# Altium PCB Multiç.PcbDoc
Units mm, origin at the board's own origin, x right, y up, seen from the top; angles counter-clockwise.
Board outline 54.1 x 51.31 mm, 4 copper layers (Top Layer, Layer 2, Layer 3, Bottom Layer), stack 1.391 mm thick; 18 components, 10 nets, 44 pads, 12 vias.
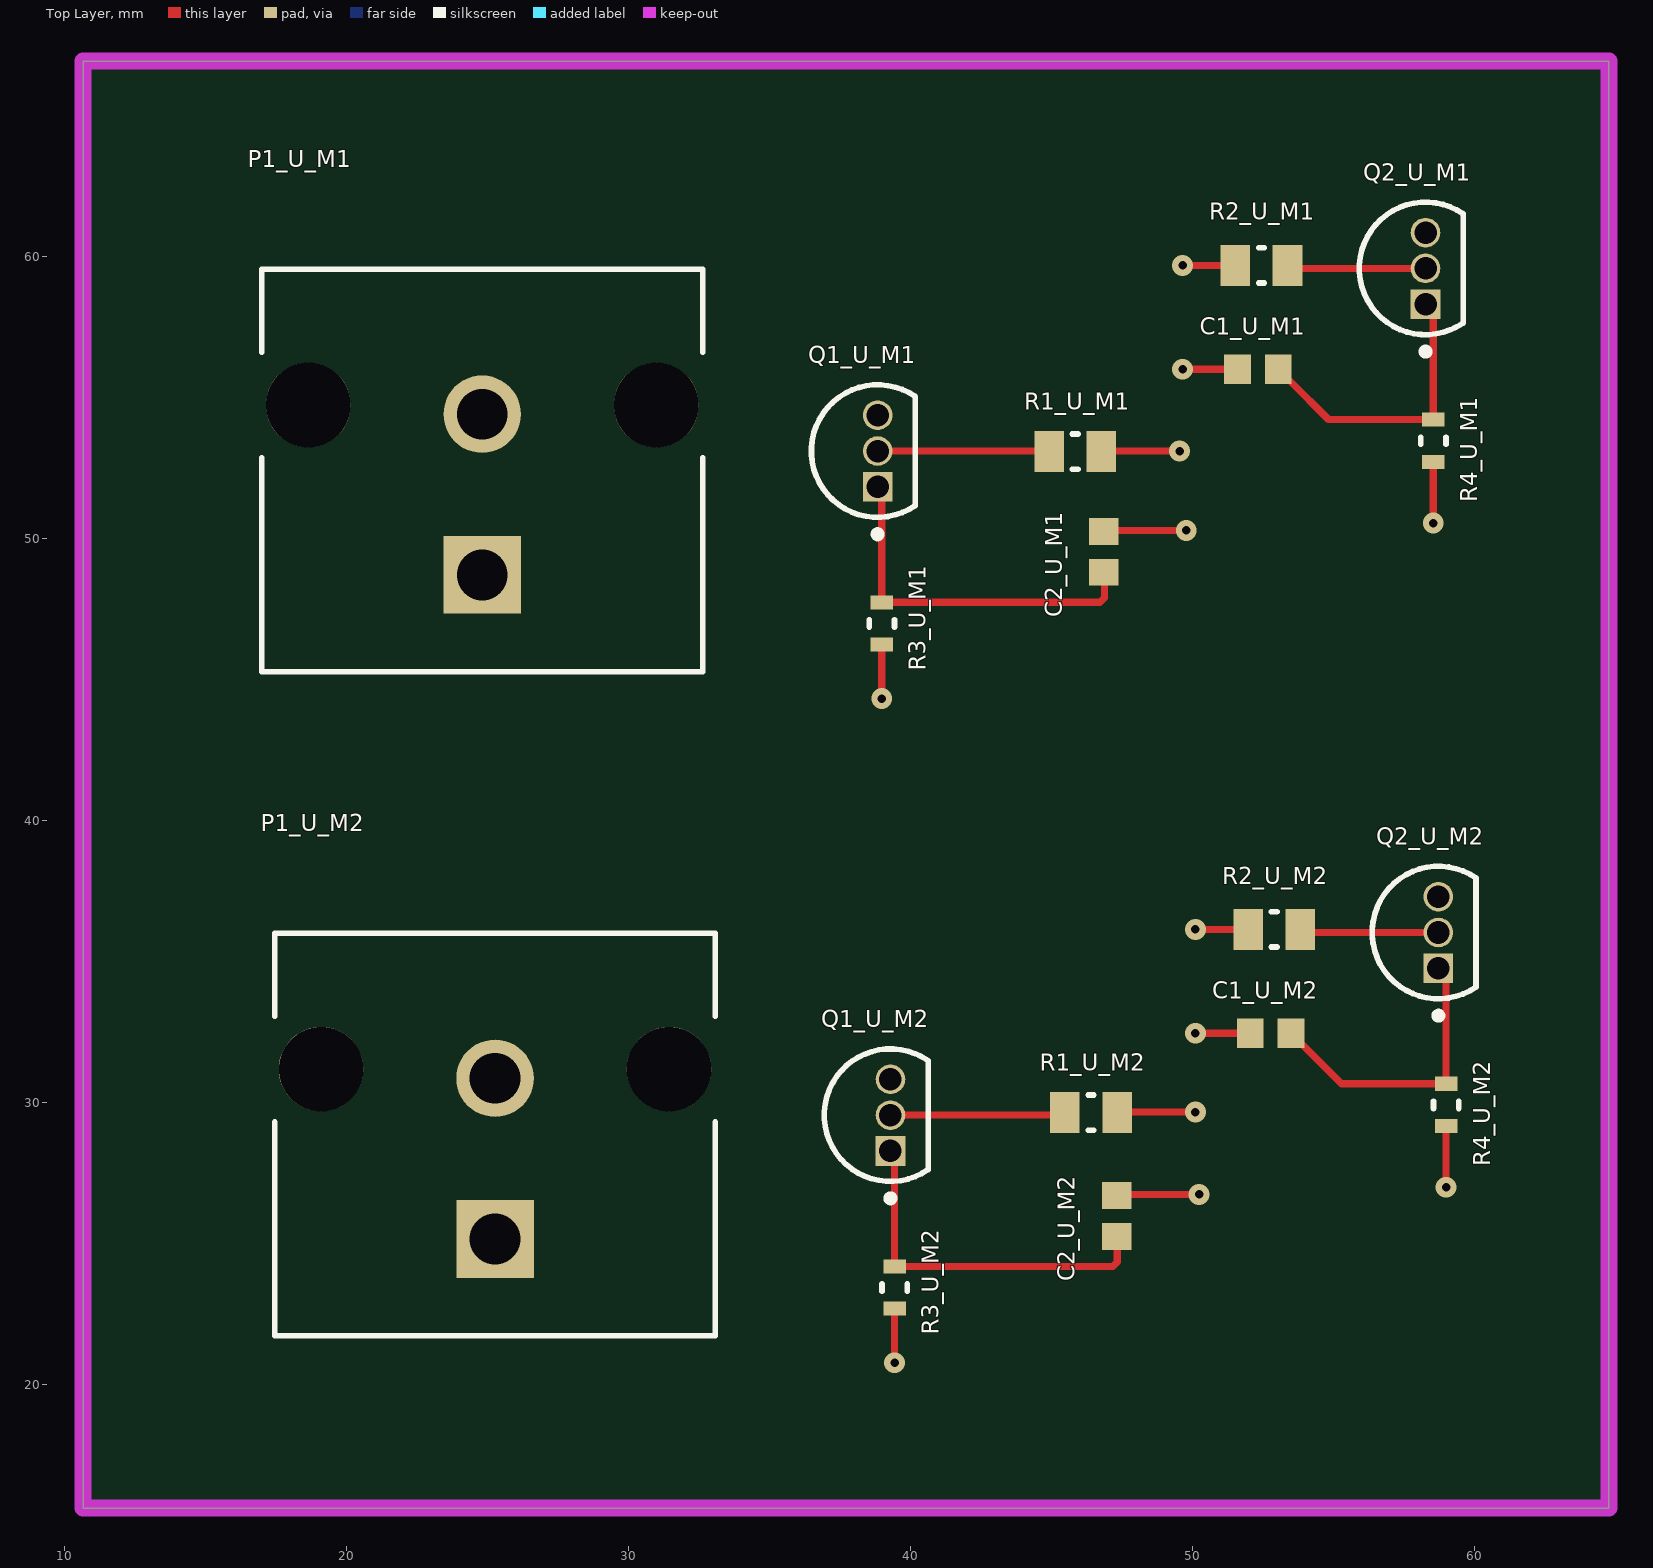
[diagram p0: Top Layer view]
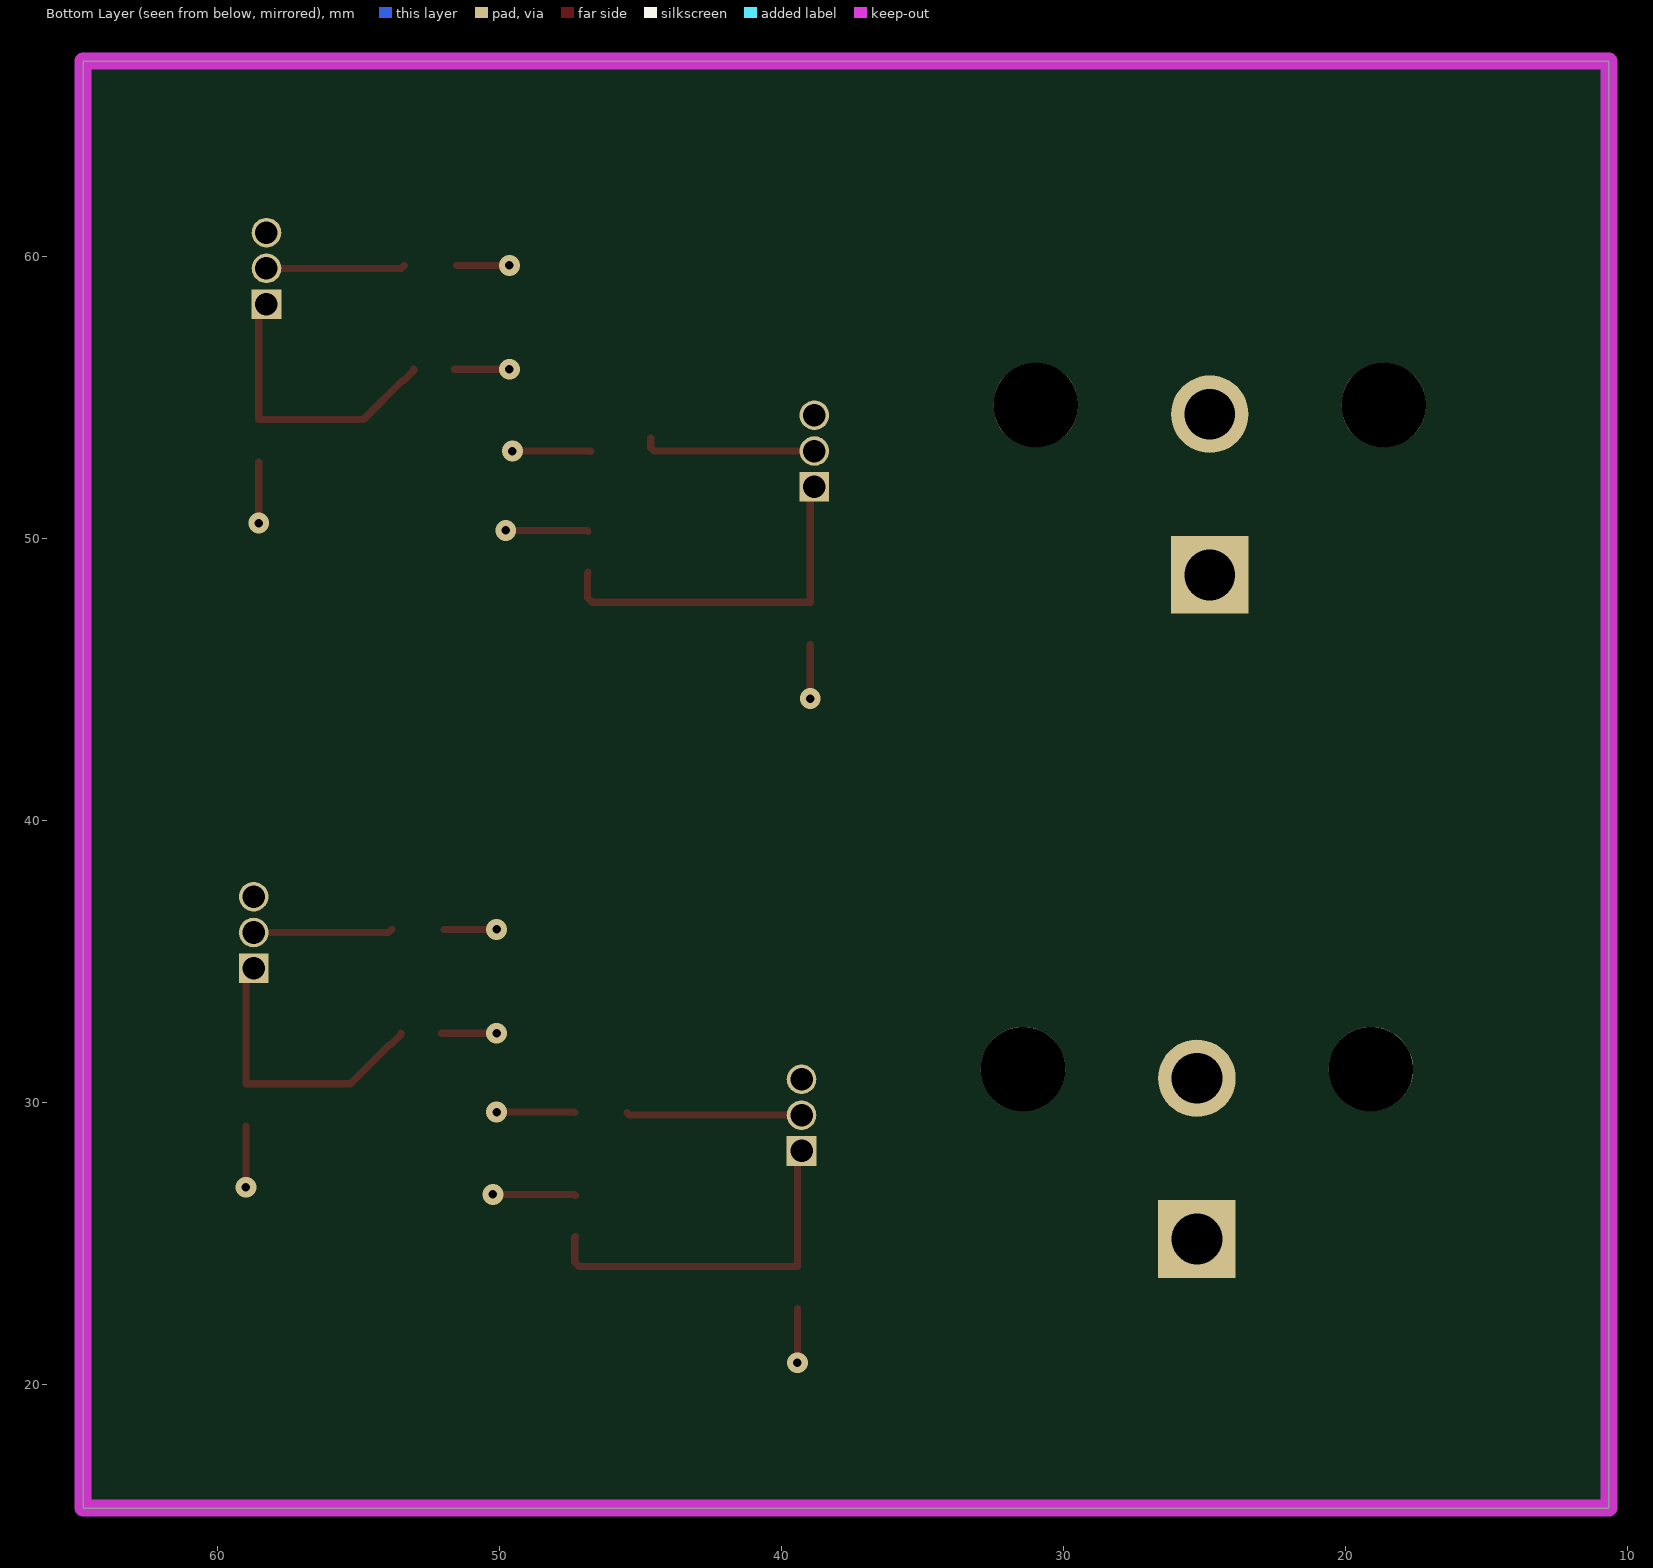
[diagram p1: Bottom Layer view, seen from below]
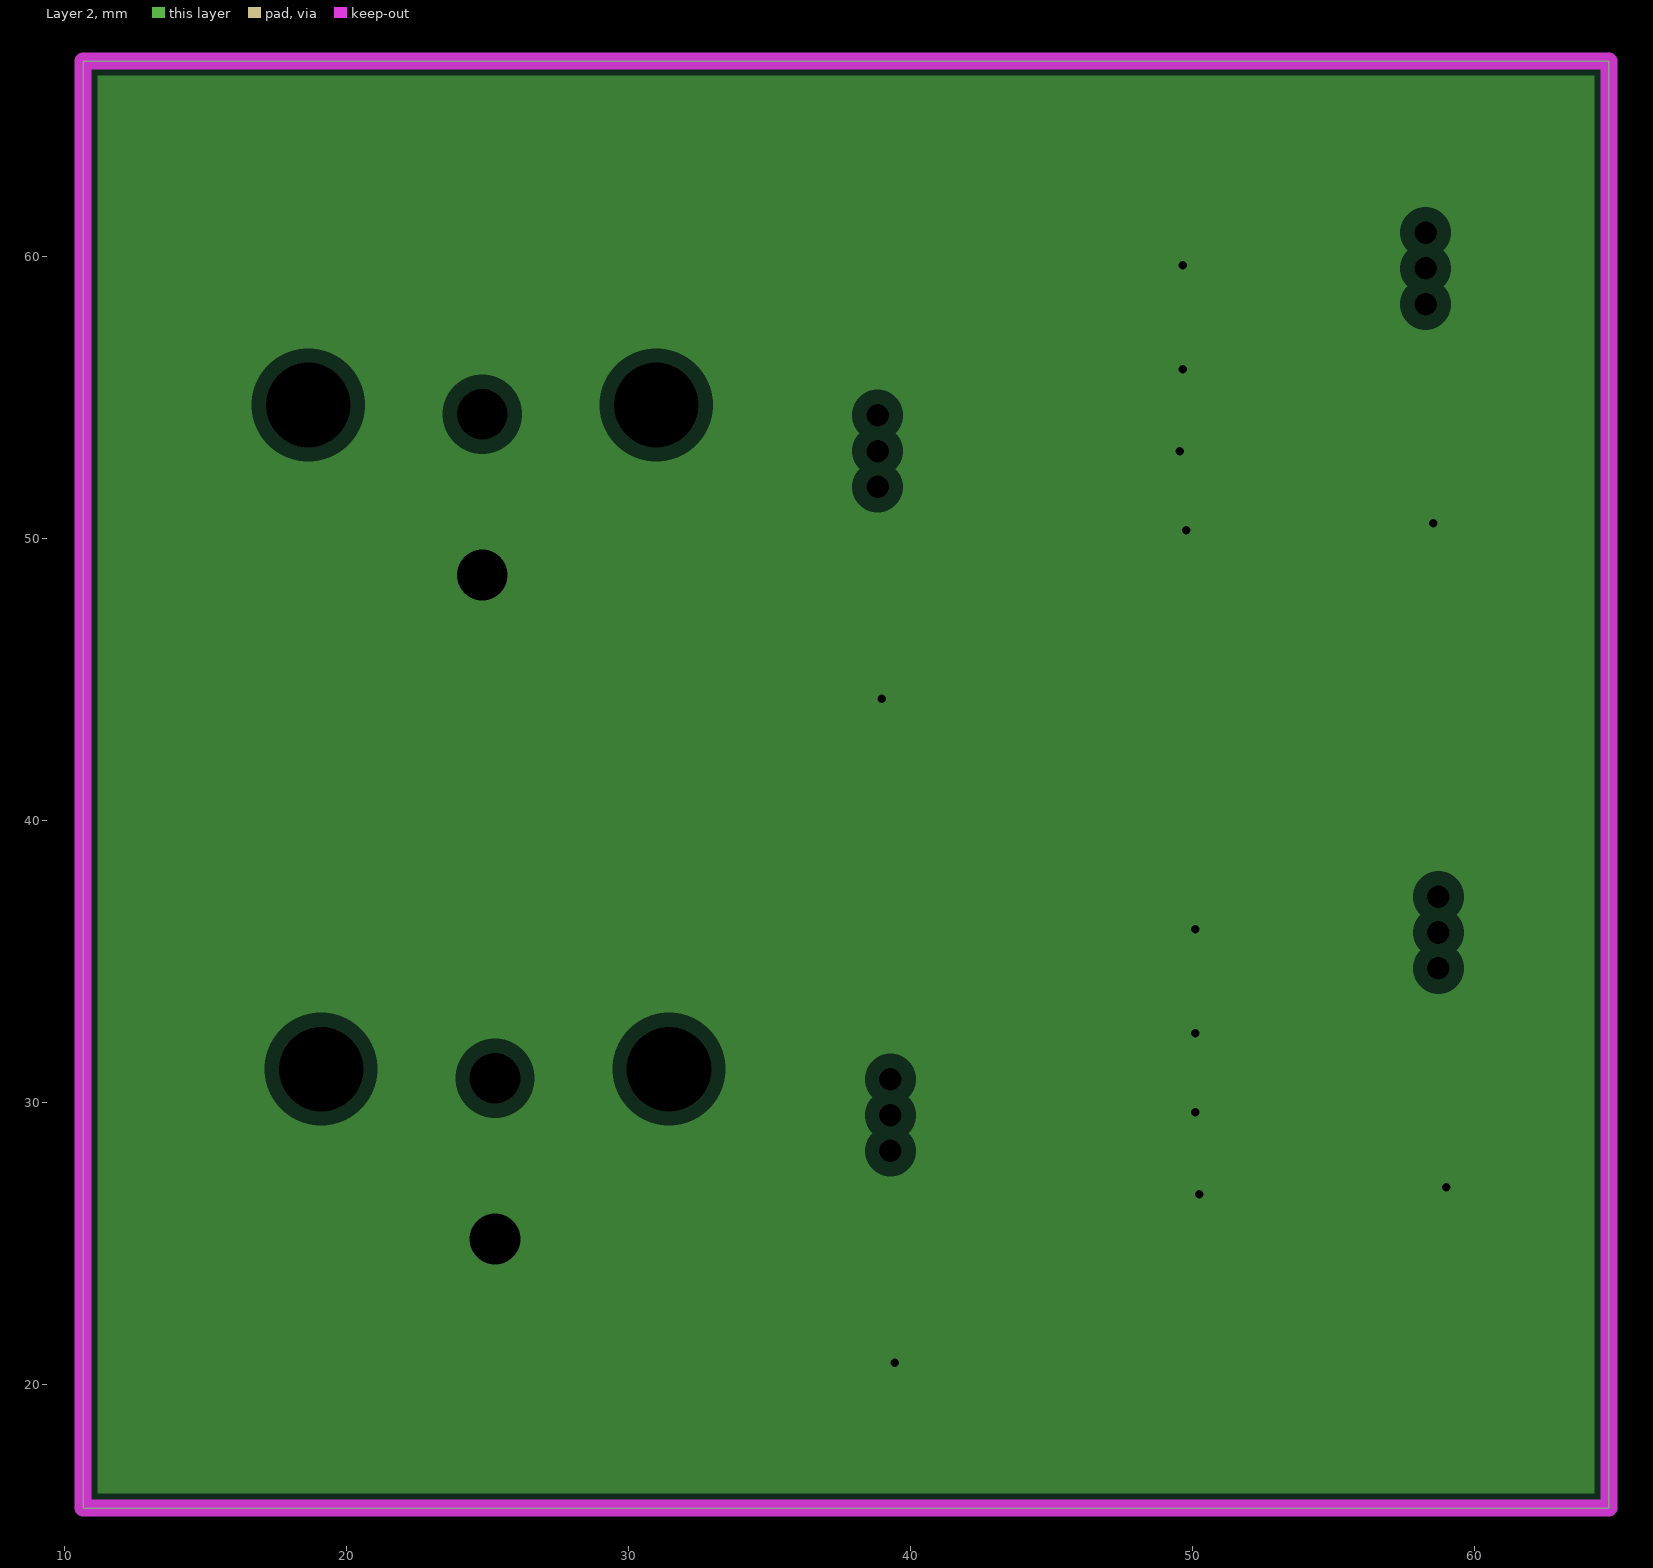
[diagram p2: Layer 2, clearances drawn from the general rule]
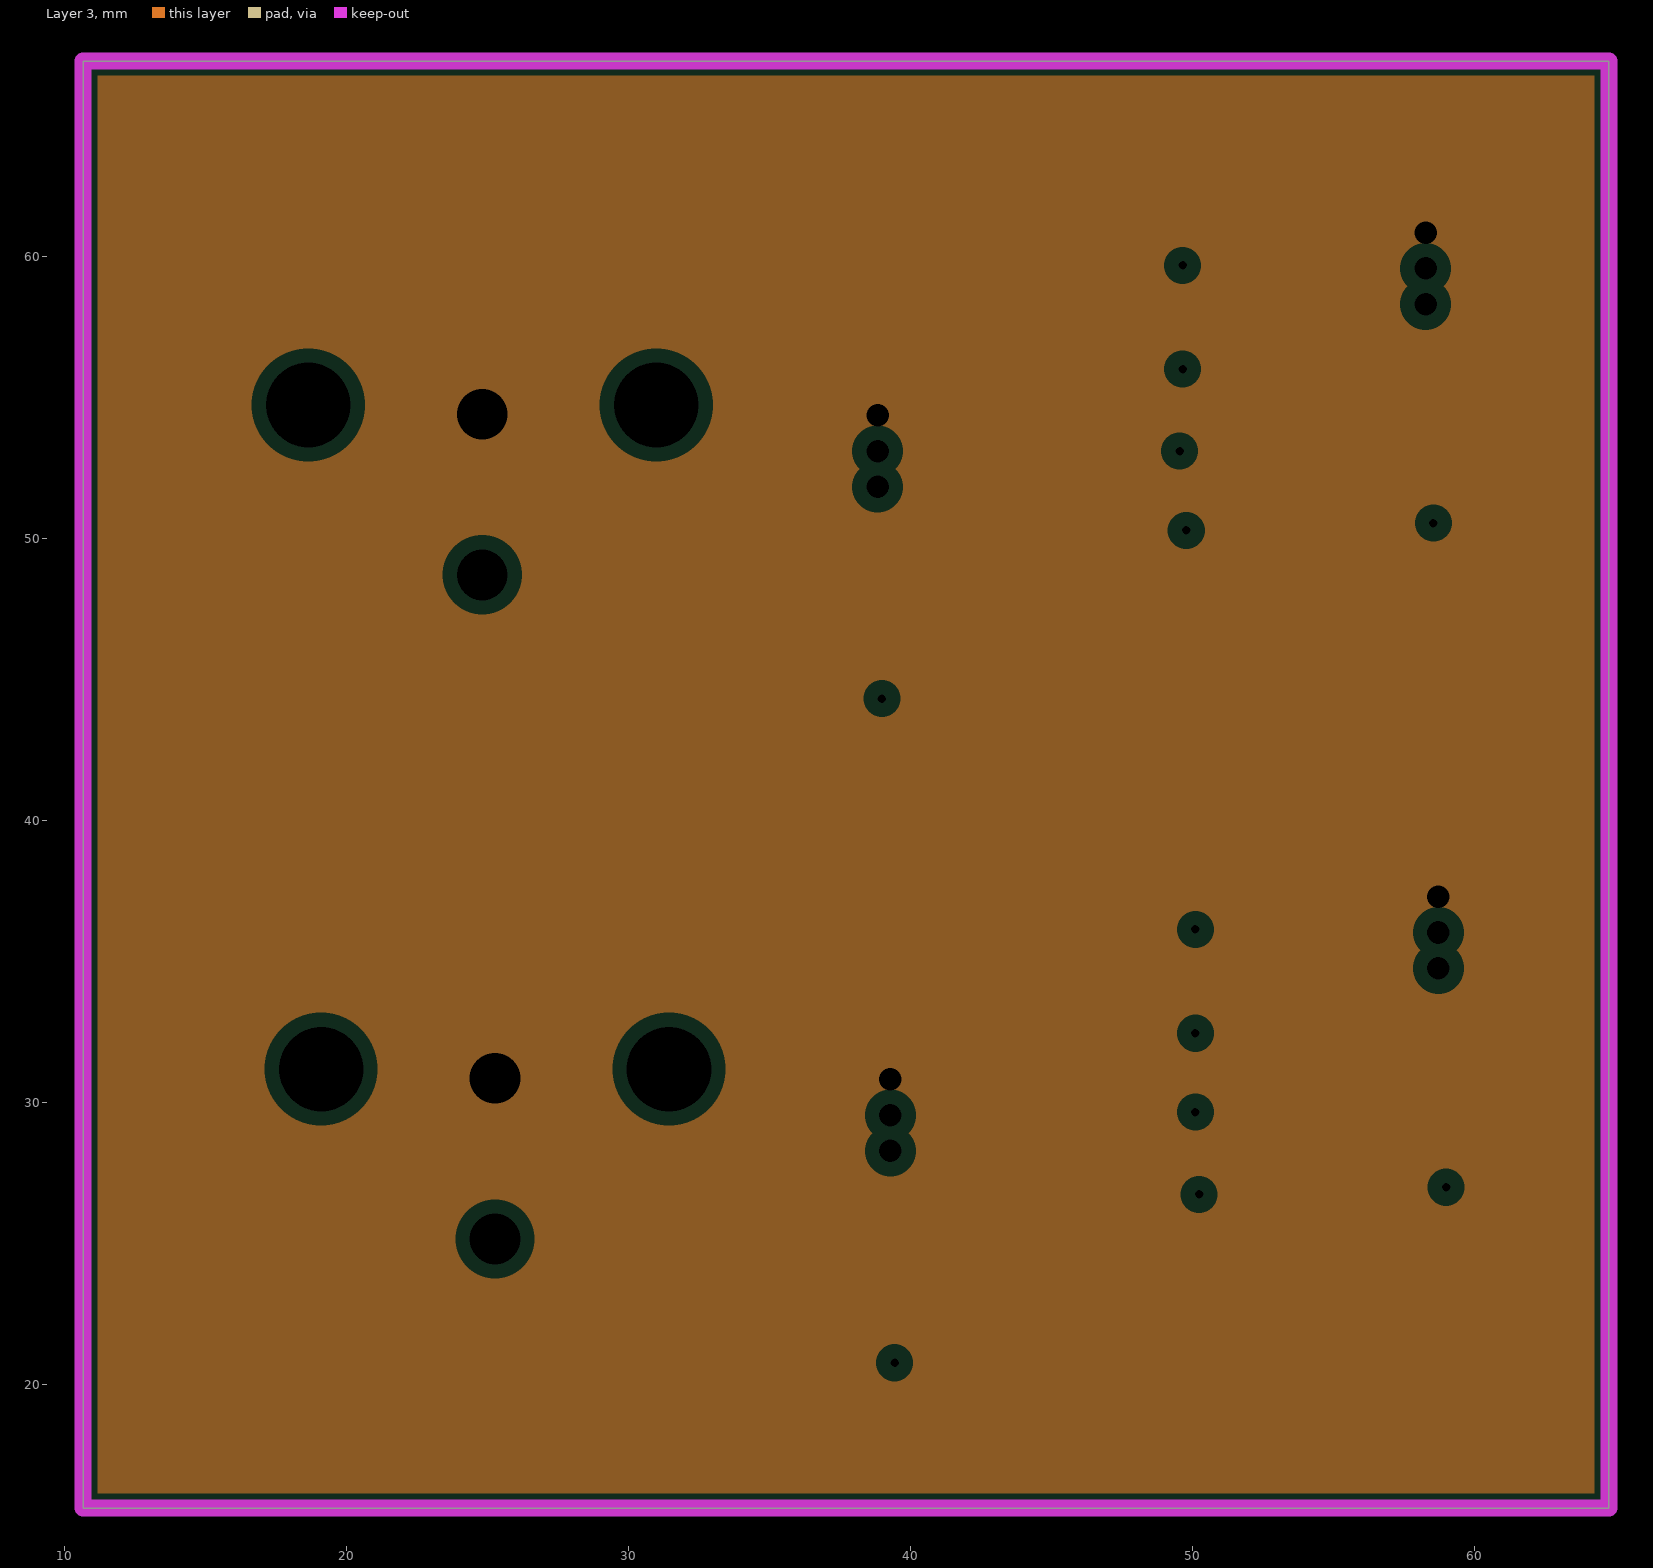
[diagram p3: Layer 3, clearances drawn from the general rule]

## Layer stack, top to bottom
Top Solder: solder mask 0.0102, Solder Resist, Dk 3.5
Top Layer: signal copper 0.0356
Dielectric 2: prepreg 0.1295, PP-017, Dk 4.3
Layer 2: plane copper 0.035, net P12V
Dielectric 1: core 0.9906,  , Dk 4.6
Layer 3: plane copper 0.035, net GND
Dielectric 3: prepreg 0.1295, PP-017, Dk 4.3
Bottom Layer: signal copper 0.0356
Bottom Solder: solder mask 0.0102, Solder Resist, Dk 3.5

## Board outline
10.668,15.621 64.77,15.621 64.77,66.929 10.668,66.929

## Design rules (kind name [scope] priority, off if disabled: settings)
Clearance [All] p1: gap=0.2 ignorepadtopadclearanceinfootprint=FALSE
HoleSize HoleSize_1 [All] p1: absolutevalues=TRUE maxlimit=3 minlimit=0.025 maxpercent=80.000 minpercent=20.000
HoleToHoleClearance [All] p1: gap=0.3 allowstackedmicrovias=TRUE
MinimumSolderMaskSliver [All] p1: minsoldermaskwidth=0.08
PlaneClearance [All] p1: clearance=0.508
PlaneConnect [All] p1: pad.planeconnectstyle=Relief pad.reliefexpansion=0.508 pad.reliefentries=4 pad.reliefconductorwidth=0.254 pad.reliefairgap=0.254 via.planeconnectstyle=Direct via.reliefexpansion=0.508 via.reliefentries=4 via.reliefconductorwidth=0.254 via.reliefairgap=0.254
PolygonConnect [All] p1: connectstyle=Relief reliefconductorwidth=0.254 reliefentries=4 polygonreliefangle="90 Angle" airgapwidth=0.254
RoomDefinition U_M2 [InComponentClass('U_M2')] p1: confinementstyle=ConfineIn formatcopy=TRUE lockcomponents=FALSE outline 15.695,18.613 62.304,18.613 62.304,40.457 15.695,40.457
RoomDefinition U_M1 [InComponentClass('U_M1')] p2: confinementstyle=ConfineIn formatcopy=TRUE lockcomponents=FALSE outline 15.24,42.164 61.849,42.164 61.849,64.008 15.24,64.008
RoutingVias [All] p1: holewidth=0.3 width=0.74 viastyle="Through Hole" minholewidth=0.3 minwidth=0.74 maxholewidth=0.3 maxwidth=0.74
SilkToSilkClearance [All] p1: silktosilkclearance=0.08
SilkToSolderMaskClearance [IsPad] p1: minsilkscreentomaskgap=0 clearancetoexposedcopper=TRUE
SolderMaskExpansion [All] p1: expansion=0 istentingtop=FALSE
Width [All] p1: maxlimit=1 minlimit=0.2 preferedwidth=0.254
23 further rules are at their usual default settings.

## Classes and differential pairs
channel class Multivibrador: U_M1 U_M2
component class U_M2: C1_U_M2 C2_U_M2 P1_U_M2 Q1_U_M2 Q2_U_M2 R1_U_M2 R2_U_M2 R3_U_M2 R4_U_M2
component class U_M1: C1_U_M1 C2_U_M1 P1_U_M1 Q1_U_M1 Q2_U_M1 R1_U_M1 R2_U_M1 R3_U_M1 R4_U_M1

## Components (designator, comment, footprint, x,y, rotation, side; value= is the part's Value field where it differs from the comment)
C1_U_M1 "GRM188R71H223KA01D" CAPC1608X90X35ML10T15 52.324,56.007 r180 top value=22nF (schematic designator C1)
C1_U_M2 "GRM188R71H223KA01D" CAPC1608X90X35ML10T15 52.779,32.456 r180 top value=22nF (schematic designator C1)
C2_U_M1 "GRM188R71H223KA01D" CAPC1608X90X35ML10T15 46.863,49.53 r270 top value=22nF (schematic designator C2)
C2_U_M2 "GRM188R71H223KA01D" CAPC1608X90X35ML10T15 47.318,25.979 r270 top value=22nF (schematic designator C2)
P1_U_M1 "1720650002" FP-1720650002-MFG 24.818,52.417 r0 top (schematic designator P1)
P1_U_M2 "1720650002" FP-1720650002-MFG 25.273,28.866 r0 top (schematic designator P1)
Q1_U_M1 "BC547B" ONSC-TO-92-3-29-11 38.84,53.104 r90 top (schematic designator Q1)
Q1_U_M2 "BC547B" ONSC-TO-92-3-29-11 39.295,29.553 r90 top (schematic designator Q1)
Q2_U_M1 "BC547B" ONSC-TO-92-3-29-11 58.271,59.581 r90 top (schematic designator Q2)
Q2_U_M2 "BC547B" ONSC-TO-92-3-29-11 58.726,36.03 r90 top (schematic designator Q2)
R1_U_M1 "CRCW0805100KJNEA" RESC2013X50X30NL20T20 45.847,53.086 r0 top value=100K (schematic designator R1)
R1_U_M2 "CRCW0805100KJNEA" RESC2013X50X30NL20T20 46.407,29.644 r0 top value=100K (schematic designator R1)
R2_U_M1 "CRCW0805100KJNEA" RESC2013X50X30NL20T20 52.451,59.69 r180 top value=100K (schematic designator R2)
R2_U_M2 "CRCW0805100KJNEA" RESC2013X50X30NL20T20 52.906,36.139 r180 top value=100K (schematic designator R2)
R3_U_M1 "ESR03EZPJ102" FP-ESR03-MFG 38.989,46.99 r270 top value=1K (schematic designator R3)
R3_U_M2 "ESR03EZPJ102" FP-ESR03-MFG 39.444,23.439 r270 top value=1K (schematic designator R3)
R4_U_M1 "ESR03EZPJ102" FP-ESR03-MFG 58.547,53.467 r270 top value=1K (schematic designator R4)
R4_U_M2 "ESR03EZPJ102" FP-ESR03-MFG 59.002,29.916 r270 top value=1K (schematic designator R4)

## Footprints (in the part's own frame and the unit in brackets; to place one, negate y for a bottom-side part, rotate by r counter-clockwise, add the part's x,y. Pads: shape width x height; smd on the part's side, far side on the other; paste and mask are expansions set on the pad)
CAPC1608X90X35ML10T15 [mm] "Chip Capacitor, 2-Leads, Body 1.60x0.80mm, IPC Low Density"
  rect 0.95x1.05 smd: 1(-0.725,0) 2(0.725,0)
  body extent -0.85,-0.45 0.85,0.45, height 0.9
FP-1720650002-MFG [mm]
  rect 2.75x2.75 hole 1.8 paste-1000 mask+0: 1(0,-3.705)
  round 2.75 hole 1.8 paste-1000 mask+0: 2(0,1.995)
  round 3 hole 3 unplated paste-1000 mask+0: ""(-6.17,2.32) ""(6.17,2.32)
  silkscreen extent -7.82,-7.14 7.82,7.14, body extent -8.2,-7.52 8.2,9.76, height 0.25
FP-ESR03-MFG [mm]
  rect 0.5x0.8 smd paste+0 mask+0: 1(-0.75,0) 2(0.75,0)
  silkscreen extent -0.13,-0.45 0.13,0.45, body extent -1.1,-0.55 1.1,0.55, height 0.25
ONSC-TO-92-3-29-11 [mm] "TO, 3-Leads, Body Dia 4.7mm, Pitch 1.27mm"
  rect 1.05x1.05 hole 0.8: 1(-1.27,0)
  round 1.05 hole 0.8: 2(0,0) 3(1.27,0)
  silkscreen extent -3.07,-1.34 2.35,2.35, body extent -2.35,-1.33 2.36,2.36, height 7.87
RESC2013X50X30NL20T20 [mm] "Chip Resistor, 2-Leads, Body 2.00x1.25mm, IPC Medium Density"
  rect 1.05x1.45 smd: 1(-0.925,0) 2(0.925,0)
  silkscreen extent -0.1,-0.63 0.1,0.63, body extent -1.1,-0.72 1.1,0.72, height 0.5

## Part data
C1_U_M1 C1_U_M2 C2_U_M1 C2_U_M2: library part CMP-2006-02910-1, Manufacturer=Murata, Part Number=GRM188R71H223KA01D
P1_U_M1 P1_U_M2: library part CMP-04776-000097-1, "CONN HEADER VERT 2POS", Current Rating=23A, Manufacturer=Molex, Temperature="-40°C to +120°C", Temperature Range High=+120°C, Temperature Range Low=-40°C, Voltage Rating=600V, Automotive=No, Category=Conn, ComponentLink2Description=Datasheet, ComponentLink2URL=http://www.molex.com/webdocs/datasheets/pdf/en-us/1720650002_PCB_HEADERS.pdf, Conn Gender=Male, Conn Orientation=Vertical, Contact Material=Gold,Nickel, Device Class L1=Connectors, Device Class L2="Headers and Wire Housings", Device Class L3=unset, Digikey Description="CONN HEADER VERT 2POS", Footprint Url=https://www.molex.com/pdm_docs/sd/1720650002_sd.pdf, Height=15.05mm, Lead Free=Yes, Manufacturer Part Number=1720650002, Mouser Description="Headers & Wire Housings Mega-Fit Vert Hdr Assy 2 ckt 15u Au", Number Of Contacts=2, Number Of Rows=2, Octopart=https://octopart.com/172065-0002-molex-34473111, Package=1720650002, Pitch=5.7mm, RoHS=TRUE
Q1_U_M1 Q1_U_M2 Q2_U_M1 Q2_U_M2: library part CMP-1048-01467-1, "Amplifier Transistor, NPN Silicon, 3-Pin TO-92, Bulk Box", Case/Package=TO-92, Collector Base Voltage (VCBO)=50V, Collector Emitter Breakdown Voltage=45V, Collector Emitter Saturation Voltage=300mV, Current Rating=100mA, Emitter Base Voltage (VEBO)=6V, Frequency=300MHz, Manufacturer="On Semiconductor", Max Operating Temperature=150°C, Max Power Dissipation=500mW, Min Operating Temperature=-65°C, Package Quantity=2000, Voltage=40V, Category=BJTs, Collector Emitter Voltage (VCEO)=45V, ComponentLink1Description="Manufacturer URL", ComponentLink1URL=http://www.onsemi.com/, ComponentLink2Description=Datasheet, ComponentLink2URL=http://www.onsemi.com/pub_link/Collateral/BC546-D.PDF, ComponentLink3Description="Package Specification", ComponentLink3URL=http://www.onsemi.cn/pub_link/Collateral/2N6426-D.PDF, ComponentLink4Description=https://datasheet.ciiva.com/17011/bc547-17011404.pdf?src-supplier=Future+Electronics, ComponentLink4URL=https://datasheet.ciiva.com/17011/bc547-17011404.pdf?src-supplier=Future+Electronics, ComponentLink5Description=https://datasheet.ciiva.com/985/bc546-547-548rev5-985523.pdf?src-supplier=Digi-Key, ComponentLink5URL=https://datasheet.ciiva.com/985/bc546-547-548rev5-985523.pdf?src-supplier=Digi-Key, ComponentLink6Description=https://datasheet.ciiva.com/972/bc546-972262.pdf?src-supplier=Digi-Key, ComponentLink6URL=https://datasheet.ciiva.com/972/bc546-972262.pdf?src-supplier=Digi-Key, ComponentLink7Description=https://datasheet.ciiva.com/1195/1868820-1195464.pdf?src-supplier=Element14, ComponentLink7URL=https://datasheet.ciiva.com/1195/1868820-1195464.pdf?src-supplier=Element14, ComponentLink8Description=https://datasheet.ciiva.com/11197/bc550-11197769.pdf?src-supplier=Avnet, ComponentLink8URL=https://datasheet.ciiva.com/11197/bc550-11197769.pdf?src-supplier=Avnet, Contact Plating=Copper,Tin,Silver, DatasheetVersion="Rev. 7", Element Configuration=Single, fT Min (MHz)=150, Gain Bandwidth Product=100MHz, Height=4.58mm, hFE Min=200, IC Continuous (A)=0.1, Lead Free="Lead Free", Length=4.58mm, Manufacturer Part Number=BC547B, Max Breakdown Voltage=45V, Max Collector Current=100mA, Max Frequency=300MHz, Mount="Through Hole", Mounting Technology="Through Hole", Number of Elements=1, Number of Pins=3, PackageDescription="3-Pin Transistor Outline, Body 4.825 x 3.685 mm, Pitch 1.27 mm", PackageReference=TO-92-3-29-11_AM_SL, PackageVersion="Rev. AM", Packaging=Bulk, Packing="Bulk Box", PartNumber=BC547B, Polarity=NPN, Power Dissipation=500mW, Radiation Hardening=No, REACH SVHC="No SVHC", RoHS=FALSE, Stock 1=14330, Supplier 1="Arrow Electronics", Supplier Part Number 1=BC547B, Transition Frequency=300MHz, Voltage Rating (DC)=45V, Weight=0.007055oz, Width=3.86mm
R1_U_M1 R1_U_M2 R2_U_M1 R2_U_M2: library part CMP-2001-04900-1, Manufacturer="Vishay Dale", Part Number=CRCW0805100KJNEA
R3_U_M1 R3_U_M2 R4_U_M1 R4_U_M2: library part CMP-08839-028118-1, "1kΩ ±5% 0.25W 0603 Anti-Surge Chip Resistor AEC-Q200", Case Code (Imperial)=0603, Case Code (Metric)=1608, Max Operating Temperature=155°C, Max Power Dissipation=250mW, Min Operating Temperature=-55°C, Package Quantity=1, Resistor Type="Thick Film", Temperature Coefficient=200ppm/°C, Tolerance=5%, Case/Package=0603, Features="Automotive AEC-Q200", Height=0.022inch, Lead Free="Lead Free", Length=0.063inch, Number of Terminations=2, Packaging="Tape and Reel", RoHS Compliant=Yes, Series=ESR, Width=0.031inch

## Via types
v1: diameter 0.74, hole 0.3, Top Layer to Bottom Layer, tented both sides, 12 vias

## Nets (pads, with @x,y where several pads share a name; then routed paths per layer and width w, separated by ;. In a path a pad name is that pad's centre, name@x,y a point inside that pad or via, vN(x,y) a via of type N, cw(c..) or ccw(c..) an arc to the next point about the centre after c; other vN are vias at no path point)
BQ1_U_M1: Q1_U_M1.2 R1_U_M1.1 | length 6.2
  Top Layer w0.254: Q1_U_M1.2 44.524,53.104 44.641,53.221 R1_U_M1.1@44.641,53.567
BQ1_U_M2: Q1_U_M2.2 R1_U_M2.1 | length 6.2
  Top Layer w0.254: Q1_U_M2.2 45.391,29.553 R1_U_M2.1
BQ2_U_M1: Q2_U_M1.2 R2_U_M1.1 | length 4.9
  Top Layer w0.254: R2_U_M1.1 53.485,59.581 Q2_U_M1.2
BQ2_U_M2: Q2_U_M2.2 R2_U_M2.1 | length 4.9
  Top Layer w0.254: R2_U_M2.1 53.94,36.03 Q2_U_M2.2
GND: P1_U_M1.2 P1_U_M2.2 Q1_U_M1.3 Q1_U_M2.3 Q2_U_M1.3 Q2_U_M2.3
NetC2_U_M1_2: C2_U_M1.2 Q1_U_M1.1 R3_U_M1.1 | length 13
  Top Layer w0.254: Q1_U_M1.1 38.989,51.685 R3_U_M1.1 46.724,47.74 46.885,47.901 46.885,48.783 C2_U_M1.2
NetC2_U_M2_2: C2_U_M2.2 Q1_U_M2.1 R3_U_M2.1 | length 13
  Top Layer w0.254: Q1_U_M2.1 39.444,28.134 R3_U_M2.1 47.179,24.189 47.34,24.35 47.34,25.232 C2_U_M2.2
OUT1: C1_U_M1.1 Q2_U_M1.1 R4_U_M1.1 | length 10.5
  Top Layer w0.254: C1_U_M1.1 53.049,55.957 53.397,55.609 53.447,55.609 54.839,54.217 R4_U_M1.1 58.547,58.035 Q2_U_M1.1
OUT2: C1_U_M2.1 Q2_U_M2.1 R4_U_M2.1 | length 10.5
  Top Layer w0.254: C1_U_M2.1 53.504,32.406 53.852,32.058 53.902,32.058 55.294,30.666 R4_U_M2.1 59.002,34.484 Q2_U_M2.1
P12V: C1_U_M1.2 C1_U_M2.2 C2_U_M1.1 C2_U_M2.1 P1_U_M1.1 P1_U_M2.1 R1_U_M1.2 R1_U_M2.2 R2_U_M1.2 R2_U_M2.2 R3_U_M1.2 R3_U_M2.2 R4_U_M1.2 R4_U_M2.2 | length 27.2
  Top Layer w0.254: v1(38.989,44.323) R3_U_M1.2 ; v1(39.444,20.772) R3_U_M2.2 ; R1_U_M1.2 46.79,53.104 v1(49.552,53.104) ; C2_U_M1.1 46.9,50.292 v1(49.784,50.292) ; C2_U_M2.1 47.355,26.741 v1(50.239,26.741) ; R1_U_M2.2 47.35,29.662 v1(50.112,29.662) ; v1(49.657,56.007) C1_U_M1.2 ; v1(49.657,59.69) R2_U_M1.2 ; v1(50.112,32.456) C1_U_M2.2 ; v1(50.112,36.139) R2_U_M2.2 ; v1(58.547,50.546) R4_U_M1.2 ; v1(59.002,26.995) R4_U_M2.2
pads on no net: P1_U_M1. P1_U_M2.

## Polygon pours and split planes (outlines as drawn)
P12V on Layer 2 (split plane): 64.26,16.131 11.178,16.131 11.178,66.419 64.26,66.419
GND on Layer 3 (split plane): 64.26,16.131 11.178,16.131 11.178,66.419 64.26,66.419

## Keep-outs
Keep-Out Layer:
  the board outline again, w0.6